# Altium PCB PCB_AltiumExport_OpenComs_ABP1_2023-05-12.pcbdoc
Units mil, origin at the board's own origin, x right, y up, seen from the top; angles counter-clockwise.
Board outline 4199.99 x 4586.61 mil, 2 copper layers (Top Layer, Bottom Layer); 111 components, 82 nets, 307 pads, 82 vias.
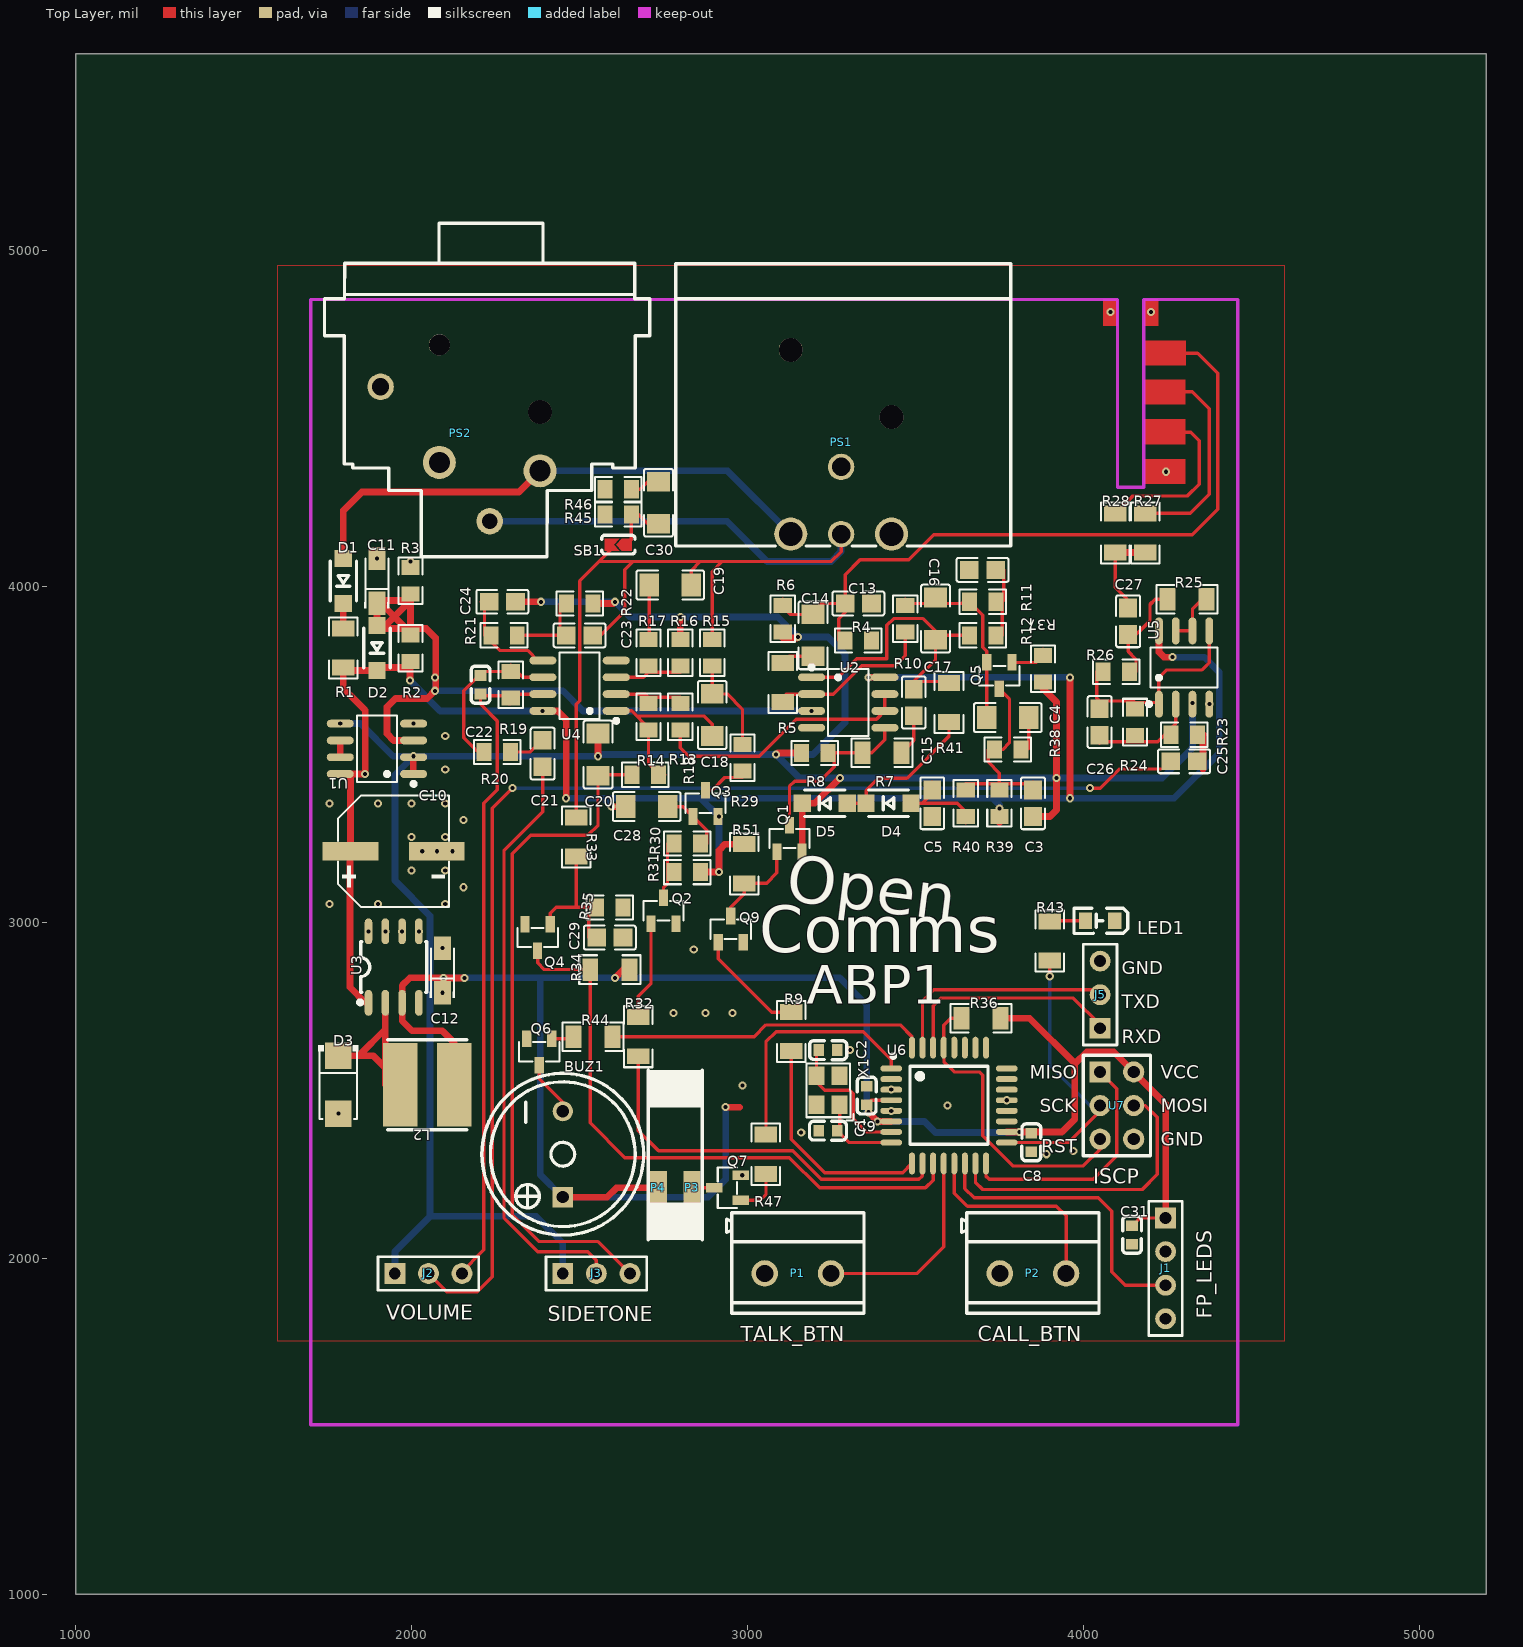
[diagram p0: Top Layer view]
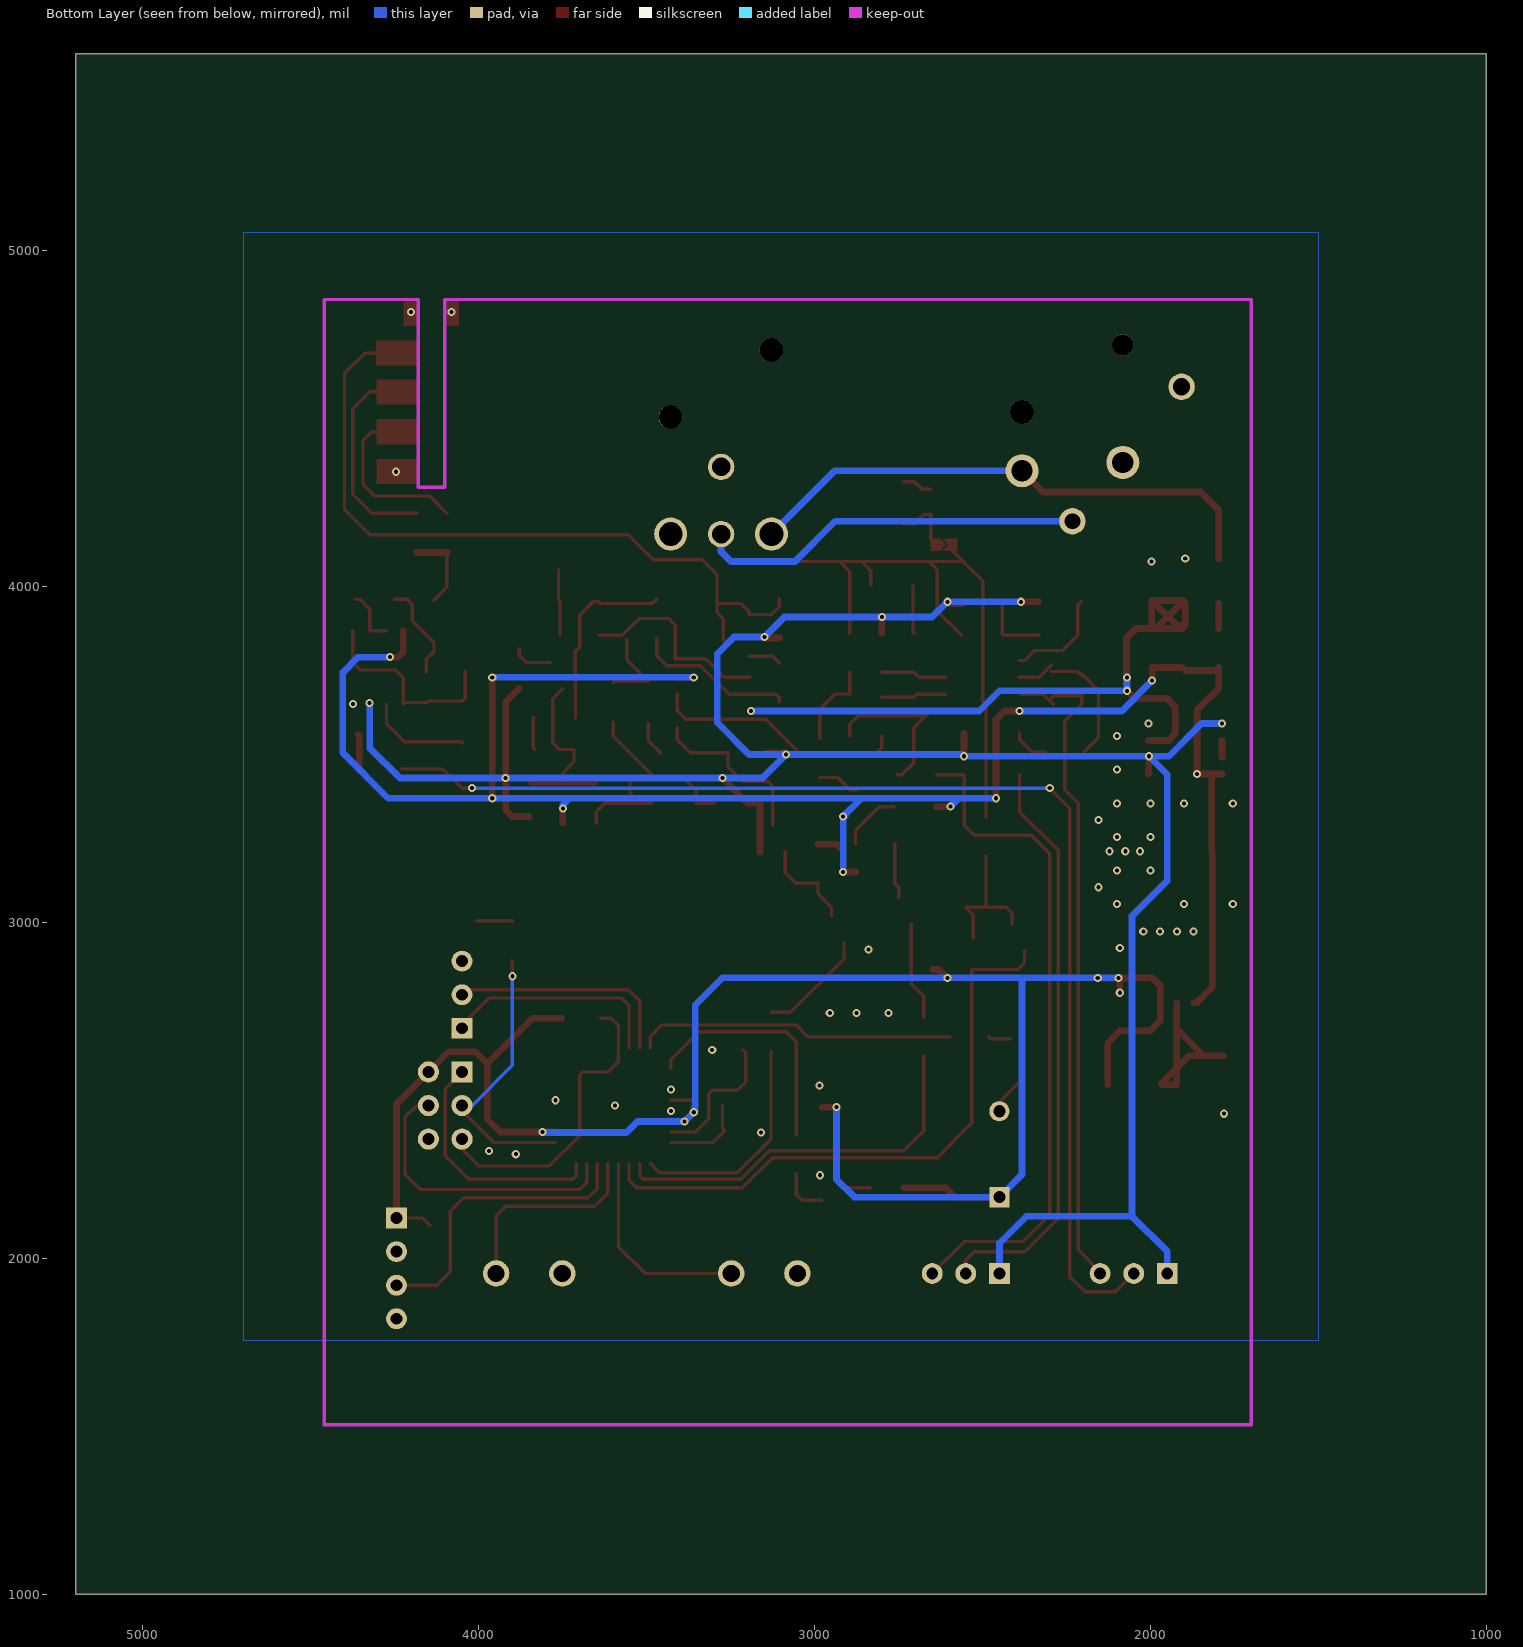
[diagram p1: Bottom Layer view, seen from below]

## Layer stack, top to bottom
Top Layer: signal copper (thickness not stored)
Dielectric: dielectric 12.6, FR-4, Dk 4.8
Bottom Layer: signal copper (thickness not stored)

## Board outline
5199.99,1000 1000,1000 1000,5586.61 5199.99,5586.61

## Components (designator, comment, footprint, x,y, rotation, side; value= is the part's Value field where it differs from the comment)
BUZ1 "CHENZJ1:BUZZER_12X9.5RM6.5" BUZ-TH_BD12.0-P6.50-D0.6_SEA-1285F 2450,2310.01 r90 top
C1 "22p" C0603 3240,2380.01 r0 top
C2 "22p" C0603 3240,2620 r180 top
C3 "100p" C0805 3850,3355 r90 top
C4 "820p" C1206 3775,3610 r0 top
C5 "0.47u" C0805 3550,3355 r90 top
C8 "1u" C0603 3845,2345.01 r270 top
C9 "1u" C0603 3355,2485.01 r90 top
C10 "100uF" CAP-SMD_BD8.0-L8.3-W8.3-FD 1946.5,3212.21 r0 top
C11 "10uF" CAP-SMD_L3.2-W1.6-RD-C7171 1896.5,4017.21 r90 top
C12 "10uF" CAP-SMD_L3.2-W1.6-RD-C7171 2091.5,2857.21 r90 top
C13 "470p" C0805 3330,3950 r180 top
C14 "1u" C1206 3195,3855 r270 top
C15 "0.022u" C0805 3495,3655 r270 top
C16 "0.0047u" C0805 3700,4050 r180 top
C17 "820p" C1206 3560,3905 r270 top
C18 "4.7u" C1206 2895.06,3617.91 r90 top
C19 "1u" C1206 2770,4005 r0 top
C20 "0.0022u" C1206 2555,3500 r90 top
C21 "0.047u" C0805 2390.1,3502.9 r90 top
C22 "56p" C0603 2205.1,3707.9 r270 top
C23 "0.047u" C0805 2500,3855 r180 top
C24 "150p" C0805 2270,3955 r180 top
C25 "0.47u" C0805 4300,3480 r0 top
C26 "39p" C0805 4048.5,3596.9 r90 top
C27 "47u" C0805 4133.5,3896.9 r90 top
C28 "1u" C1206 2700,3345 r180 top
C29 "0.022u" C0805 2590,2955 r180 top
C30 "10u" C1206 2735,4250 r270 top
C31 "1u" C0603 4145,2070.01 r270 top
D1 "1N4148W" SOD-123FL_L2.6-W1.6-LS3.4-RD 1796.5,4017.21 r270 top
D2 "1N4148W" SOD-123FL_L2.6-W1.6-LS3.4-RD 1896.5,3817.21 r270 top
D3 "SS210" SMA_L4.3-W2.6-LS5.2-RD 1781.5,2517.21 r270 top
D4 "1N4148W" SOD-123FL_L2.6-W1.6-LS3.4-RD 3420,3355 r180 top
D5 "1N4148W" SOD-123FL_L2.6-W1.6-LS3.4-RD 3230,3355 r180 top
J1 "FP_LEDS" HDR-M-2.54_1X4 4245,1970.01 r270 top
J2 "VOLUME" HDR-M-2.54_1X3 2050,1955.01 r0 top
J3 "SIDETONE" HDR-M-2.54_1X3 2550,1955.01 r0 top
J5 "SERIAL" HDR-M-2.54_1X3 4050,2785 r90 top
L2 "68uH" IND-SMD_L6.0-W6.0_SWRH5D 2046.5,2517.21 r180 top
LED1 "FC-2012HRK-620D" LED0805-RD_RED 4050,3005 r180 top
P1 "TALK_BTN" CONN-TH_2P-P5.00 3150,1955.01 r0 top
P2 "CALL_BTN" CONN-TH_2P-P5.00 3850,1955.01 r0 top
P3 "TESTPAD50" TESTPAD-50-ROUND 2835,2210.01 r0 top
P4 "TESTPAD50" TESTPAD-50-ROUND 2735,2210.01 r0 top
PS1 "NC3MAAH-0" CONN-TH_NC3MAAH-0 3278.78,4256.58 r0 top
PS2 "NC3FAAH2" CONN-TH_NC3FAAH2 2145,4395 r180 top
Q1 "2N7002" SOT-23-3_L2.9-W1.3-P1.90-LS2.4-BR 3125,3250 r270 top
Q2 "SS8050" SOT-23-3_L2.9-W1.3-P1.90-LS2.4-BR 2750,3035 r270 top
Q3 "MMBT5401" SOT-23-3_L2.9-W1.3-P1.90-LS2.4-BR 2875,3355 r270 top
Q4 "SS8050" SOT-23-3_L2.9-W1.3-P1.90-LS2.4-BR 2375,2955 r90 top
Q5 "MMBF4393LT1G" SOT-23-3_L2.9-W1.3-P1.90-LS2.4-BR 3750,3735 r90 top
Q6 "SS8050" SOT-23-3_L2.9-W1.3-P1.90-LS2.4-BR 2380,2615 r90 top
Q7 "SS8050" SOT-23-3_L2.9-W1.3-P1.90-LS2.4-BR 2940,2210.01 r0 top
Q9 "SS8050" SOT-23-3_L2.9-W1.3-P1.90-LS2.4-BR 2950,2980 r270 top
R1 "22" R1206 1796.5,3817.21 r270 top
R2 "220k" R0805 1996.5,3817.2 r270 top
R3 "220k" R0805 1996.5,4017.2 r270 top
R4 "47k" R0805 3330,3840 r180 top
R5 "1k" R1206 3105,3715 r270 top
R6 "15k" R0805 3105,3905 r270 top
R7 "100k" R1206 3400,3505 r180 top
R8 "220k" R0805 3200,3505 r0 top
R9 "10k" R1206 3130,2675 r90 top
R10 "2.7k" R0805 3470,3905 r90 top
R11 "15k" R0805 3700,3955 r180 top
R12 "6.8k" R0805 3700,3855 r0 top
R13 "20k" R0805 2800.1,3612.9 r90 top
R14 "20k" R0805 2705.1,3612.9 r270 top
R15 "430" R0805 2895.1,3802.9 r90 top
R16 "47k" R0805 2800.1,3802.9 r270 top
R17 "47k" R0805 2705.1,3802.9 r90 top
R18 "2.2k" R0805 2695,3440 r180 top
R19 "120k" R0805 2295.1,3707.9 r270 top
R20 "47k" R0805 2255.1,3507.9 r180 top
R21 "15k" R0805 2275,3855 r180 top
R22 "220k" R0805 2500,3950 r180 top
R23 "5.6k" R0805 4300,3559.1 r180 top
R24 "150k" R0805 4153.5,3596.9 r90 top
R25 "22" R1206 4308.49,3961.94 r180 top
R26 "39" R0805 4098.5,3746.9 r0 top
R27 "0" R1206 4185,4160 r90 top
R28 "0" R1206 4095,4160 r90 top
R29 "2.7k" R0805 2985,3490 r90 top
R30 "330k" R0805 2820,3235 r0 top
R31 "47k" R0805 2820,3150 r180 top
R32 "4.7k" R1206 2675,2660 r270 top
R33 "100k" R1206 2490,3255 r90 top
R34 "10k" R1206 2590,2860 r0 top
R35 "470k" R0805 2590,3045 r180 top
R36 "1k" R1206 3695,2715 r0 top
R37 "150" R0805 3880,3755 r270 top
R38 "330k" R0805 3775,3515 r0 top
R39 "10M" R0805 3750,3355 r90 top
R40 "470k" R0805 3650,3355 r90 top
R41 "10k" R1206 3600,3655 r90 top
R43 "10k" R1206 3900,2945 r270 top
R44 "4.7k" R1206 2540,2660 r0 top
R45 "2.2k" R0805 2615,4215 r0 top
R46 "200" R0805 2615,4290 r180 top
R47 "4.7k" R1206 3055,2310.01 r90 top
R51 "10k" R1206 2990,3175 r90 top
SB1 "Jumper" PAD-JUMPER-2-NC_BY_PASTE_YES_SILK 2613,4125 r180 top
U1 "NE5532DR" SOIC-8_L4.9-W3.9-P1.27-LS6.0-BL 1896.5,3517.21 r90 top
U2 "NE5532DR" SOIC-8_L4.9-W3.9-P1.27-LS6.0-BL 3300,3655 r270 top
U3 "XL1509-5.0E1" SOIC-8_L5.0-W4.0-P1.27-LS6.0-BL 1946.5,2867.21 r0 top
U4 "NE5532DR" SOIC-8_L4.9-W3.9-P1.27-LS6.0-BL 2500,3705 r90 top
U5 "NE5532DR" SOIC-8_L4.9-W3.9-P1.27-LS6.0-BL 4299.99,3759.15 r0 top
U6 "ATMEGA328P-AU" TQFP-32_L7.0-W7.0-P0.80-LS9.0-BL 3600,2455.01 r270 top
U7 "ISCP" "SPI HEADER" 4100,2455.01 r0 top
X1 "16MHz" OSC-SMD_4P-L3.2-W2.5-BL 3240,2500.01 r90 top

## Footprints (in the part's own frame and the unit in brackets; to place one, negate y for a bottom-side part, rotate by r counter-clockwise, add the part's x,y. Pads: shape width x height; smd on the part's side, far side on the other; paste and mask are expansions set on the pad)
BUZ-TH_BD12.0-P6.50-D0.6_SEA-1285F [mil]
  rect 60x60 hole 36: 1(-127.95,0)
  round 60 hole 36: 2(127.95,0)
  silkscreen extent -241,-241 241,241
C0603 [mm]
  rect 0.8x0.9 smd: 1(-0.7,0) 2(0.7,0)
  silkscreen extent -1.41,-0.71 1.39,0.72
C0805 [mm]
  rect 1.41x1.35 smd: 1(-1,0) 2(1,0)
  silkscreen extent -1.96,-0.9 1.96,0.9
C1206 [mm]
  rect 1.485x1.728 smd: 1(-1.593,0) 2(1.593,0)
  silkscreen extent -2.56,-1.09 2.56,1.09
CAP-SMD_BD8.0-L8.3-W8.3-FD [mm]
  rect 4.2x1.4 smd: 1(-3.267,0) 2(3.267,0)
  silkscreen extent -4.2,-4.23 4.2,4.23
CAP-SMD_L3.2-W1.6-RD-C7171 [mil]
  rect 69.19x51.02 smd: 1(-66.39,0) 2(66.39,0)
  silkscreen extent -81,-37 66,37
CONN-TH_2P-P5.00 [mm]
  round 2 hole 1.3: 1(-2.504,0) 2(2.504,0)
  silkscreen extent -5.4,-3 5,4.6
CONN-TH_NC3FAAH2 [mm]
  round 2.5 hole 1.6: 1(1.59,0.635) 2(-6.03,1.27)
  round 2 hole 1.2: 3(-2.22,5.085)
  round 2 hole 1.3: 4(6.03,-5.085)
  round 1.8 hole 1.8 unplated: ""(-6.03,-3.175)
  round 1.6 hole 1.6 unplated: ""(1.59,-8.255)
  silkscreen extent -14.32,-17.44 10.28,7.76
CONN-TH_NC3MAAH-0 [mm]
  round 2.5 hole 1.8: 1(3.81,-2.54) 2(-3.81,-2.54)
  round 2 hole 1.4: 3(0,-2.54) 4(0,2.54)
  round 1.8 hole 1.8 unplated: ""(-3.81,11.386) ""(3.81,6.306)
  silkscreen extent -12.5,-3.44 12.83,17.9
HDR-M-2.54_1X3 [mil]
  rect 62x62 hole 35: 1(-100,0)
  round 62 hole 35: 2(0,0) 3(100,0)
  silkscreen extent -150,-50 150,50
HDR-M-2.54_1X4 [mil]
  rect 62x62 hole 35: 1(-150,0)
  round 62 hole 35: 2(-50,0) 3(50,0) 4(150,0)
  silkscreen extent -200,-50 200,50
IND-SMD_L6.0-W6.0_SWRH5D [mm]
  rect 2.6x6.3 smd: 1(-2.05,0) 2(2.05,0)
  silkscreen extent -3,-3.4 3,3.4
LED0805-RD_RED [mm]
  rect 1x1.25 smd: 1(-1.1,0) 2(1.1,0)
  silkscreen extent -2.1,-0.95 1.98,0.96
OSC-SMD_4P-L3.2-W2.5-BL [mm]
  rect 1.4x1.2 smd: 1(-1.1,-0.875) 2(1.1,-0.875) 3(1.1,0.875) 4(-1.1,0.875)
  silkscreen extent -2.29,-1.9 2.03,1.65
PAD-JUMPER-2-NC_BY_PASTE_YES_SILK [mil]
  round 0 smd: 1(-27,0) 2(33,0)
  Top Layer region: -13,-18 -42,-18 -42,18 -13,18 3.5,0
  Top Layer region: -5.5,18 38,18 38,-18 -5.5,-18 11,0
  silkscreen extent -52,-28 47,28
R0805 [mil]
  rect 44.59x54.21 smd: 1(-39.37,0) 2(39.37,0)
  silkscreen extent -69,-36 69,36
R1206 [mil]
  rect 47.54x66.97 smd: 1(-58.22,0) 2(58.22,0)
  silkscreen extent -91,-42 91,42
SMA_L4.3-W2.6-LS5.2-RD [mm]
  rect 2x2 smd: 1(-2.2,0) 2(2.2,0)
  silkscreen extent -2.98,-1.5 2.6,1.5
SOD-123FL_L2.6-W1.6-LS3.4-RD [mm]
  rect 1.3x1.3 smd: 1(1.7,0) 2(-1.7,0)
  silkscreen extent -1.5,-1 1.5,1
SOIC-8_L4.9-W3.9-P1.27-LS6.0-BL [mm]
  oval 0.588x2.045 smd: 1(-1.905,-2.773) 2(-0.635,-2.773) 3(0.635,-2.773) 4(1.905,-2.773) 5(1.905,2.773) 6(0.635,2.773) 7(-0.635,2.773) 8(-1.905,2.773)
  silkscreen extent -2.8,-2.92 2.53,1.52
SOIC-8_L5.0-W4.0-P1.27-LS6.0-BL [mil]
  oval 22.38x76.78 smd: 1(-75,-106.5) 2(-25,-106.5) 3(25,-106.5) 4(75,-106.5) 5(75,106.5) 6(25,106.5) 7(-25,106.5) 8(-75,106.5)
  silkscreen extent -106,-111 98,75
SOT-23-3_L2.9-W1.3-P1.90-LS2.4-BR [mm]
  rect 1.25x0.7 smd: 1(1,-0.95) 2(1,0.95) 3(-1,0)
  silkscreen extent -0.73,-1.53 0.73,1.53
"SPI HEADER" [mm]
  rect 1.6x1.6 hole 0.914: 1(-1.27,2.54)
  round 1.6 hole 0.914: 2(1.27,2.54) 3(-1.27,0) 4(1.27,0) 5(-1.27,-2.54) 6(1.27,-2.54)
  silkscreen extent -2.54,-3.81 2.54,3.81
TESTPAD-50-ROUND [mil]
  rect 50x100 smd: 1(0,0)
TQFP-32_L7.0-W7.0-P0.80-LS9.0-BL [mm]
  oval 0.45x1.65 smd: 1(-2.8,-4.369) 2(-2,-4.369) 3(-1.2,-4.369) 4(-0.4,-4.369) 5(0.4,-4.369) 6(1.2,-4.369) 7(2,-4.369) 8(2.8,-4.369) 17(2.8,4.369) 18(2,4.369) 19(1.2,4.369) 20(0.4,4.369) 21(-0.4,4.369) 22(-1.2,4.369) 23(-2,4.369) 24(-2.8,4.369)
  oval 1.65x0.45 smd: 9(4.382,-2.8) 10(4.382,-2) 11(4.381,-1.2) 12(4.381,-0.4) 13(4.381,0.4) 14(4.381,1.2) 15(4.381,2) 16(4.381,2.8) 25(-4.382,2.8) 26(-4.382,2) 27(-4.381,1.2) 28(-4.381,0.4) 29(-4.381,-0.4) 30(-4.381,-1.2) 31(-4.381,-2) 32(-4.381,-2.8)
  silkscreen extent -3.91,-4.36 2.94,2.95

## Via types
v1: diameter 24, hole 12, Top Layer to Bottom Layer, tented both sides, 82 vias

## Nets (pads, with @x,y where several pads share a name; then routed paths per layer and width w, separated by ;. In a path a pad name is that pad's centre, name@x,y a point inside that pad or via, vN(x,y) a via of type N, cw(c..) or ccw(c..) an arc to the next point about the centre after c; other vN are vias at no path point)
15VREF: C11.1 D2.2 R2.1 R3.2 U1.3 U2.3 | length 2379.1
  Top Layer w20.16: D2.2 1921.6,3884.1 R3.2@1996.5,3959 ; U1.3@2005.6,3542.2 1946.5,3542.2 1926.5,3562.2 1926.5,3642.2 1951.5,3667.2 2046.5,3667.2 2071.5,3692.2 2071.5,3847.2 2043.3,3875.4 1996.5,3875.4 1983.3,3875.4 1907.9,3950.8 C11.1 ; C11.1 D2.2 1905.21,3875.43 1996.5,3875.43 R3.2@1996.5,3958.99 ; C11.1 1904.67,3958.99 R3.2@1996.5,3958.99
  Bottom Layer w20.16: v1(2070,3730) v1(2070,3690) 2450,3690 2510,3630 v1(3190,3630)
+5V: BUZ1.1 C8.1 C9.1 C12.1 C31.1 J1.1 L2.1 P4.1 R34.2 R36.2 U3.3 U6.4 U6.6 U6.18 U7.2 | length 6243.1
  Top Layer w10: C9.1 3368.31,2470.76 U6.4 ; C31.1 4167.4,2120 J1.1
  Top Layer w19.68: 2076.5,2832.21 2079.29,2835 v1(2095,2835) ; v1(2091.5,2790.82) 2091.5,2835 1994.3,2835 1971.5,2812.2 U3.3 1971.5,2707.2 2001.5,2677.2 2091.5,2677.2 2127.2,2641.5 L2.1 ; R36.2 3840,2715 3975,2580 ; U6.18 v1(3810.48,2376.27) ; v1(3810.48,2376.27) 3936.3,2376.3 3975,2415 3975,2580 ; J1.1 4245,2460 4090,2615 4010,2615 3975,2580
  Top Layer w20.16: v1(2091.5,2790.82) 2091.5,2835 v1(2157.09,2835) ; BUZ1.1 2582,2182 2610,2210 P4.1 ; v1(2605,2835) 2630,2860 R34.2 ; v1(2935,2450) 2976.78,2450.01 ; C9.1 3360,2452.45 v1(3360,2435) v1(3387.23,2407.77) U6.6
  Bottom Layer w19.68: v1(2095,2835) v1(2157.09,2835) v1(2605,2835) 3275,2835 3355,2755 3355,2440 v1(3387.23,2407.77) ; 2382.62,2835 2382.62,2249.43 BUZ1.1
  Bottom Layer w20.16: BUZ1.1 2882,2182.1 2935,2235 v1(2935,2450) ; v1(3387.23,2407.77) 3527.2,2407.8 3560,2375 3809.2,2375 v1(3810.48,2376.27)
+15V: C3.1 C20.2 C24.1 D5.1 J2.1 J3.1 Q1.2 R6.2 R8.1 R16.1 R22.1 R37.2 U1.1 U1.2 U1.5 U5.3 | length 7487.3
  Top Layer w19.68: v1(2005,3495) 2005,3443.71 U1.1@2006.5,3442.21
  Top Layer w20.16: C24.1@2332.7,3955 v1(2385,3955) ; v1(2555,3495) C20.2 ; R22.1@2558.22,3950.01 2600.01,3950.01 v1(2605,3955) ; v1(2800,3910) 2800,3861.18 R16.1@2800.06,3861.12 ; v1(3085,3500) 3090,3505 R8.1@3141.78,3505 ; R6.2@3105,3846.78 3146.79,3846.78 v1(3150,3850) ; Q1.2 3163.1,3211.33 3163.1,3253.11 D5.1 ; D5.1 3200,3355 v1(3275,3430) ; C3.1 3900.6,3315.6 3920,3335 v1(3920,3430) 3920,3656.78 R37.2@3880,3696.78
  Bottom Layer w20.16: v1@1787.3,3592.2 1847.8,3592.2 1945,3495 v1(2005,3495) ; J2.1 1950,2020 2055,2125 ; v1(2385,3955) v1(2605,3955) 2650,3910 3090,3910 v1(3150,3850) 3195,3850 3240,3850 3290,3800 3290,3690 3290,3595 3195,3500 v1(3085,3500) ; J3.1 2450,2045 2370,2125 2055,2125 ; v1(4324.99,3654.15) 4325,3520 4235,3430 v1(3920,3430) v1(3275,3430) 3155,3430 v1(3085,3500) ; v1(2005,3495) 1950,3440 1950,3125 2055,3020 2055,2125 ; v1(2005,3495) 2520,3495 v1(2555,3495) 2560,3500 v1(3085,3500)
  other v1: 1787.35,3592.21
+30V: C10.1 C28.2 D2.1 Q3.2 R1.2 R2.2 R31.1 R39.1 R51.2 U1.8 U2.8 U3.1 U4.8 U5.8 | length 6274.5
  Top Layer w19.68: C10.1 1816.5,3210.84 1816.5,2807.21 1863,2760.71 U3.1
  Top Layer w20.16: U1.8 v1(1861.5,3442.21) ; C10.1 1817.9,3442.2 v1(1861.5,3442.21) ; v1(1995,3720) 1995,3757.49 1996.5,3758.99 1905.21,3758.99 D2.1 1805.21,3750.28 R1.2 1796.5,3697.2 1861.5,3632.2 v1(1861.5,3442.21) ; U4.8 2435,3630 2460,3605 v1(2460,3370) ; v1(2595,3345) C28.2 ; R31.1@2878.2,3150 v1(2915,3150) 2915,3215 2933.2,3233.2 R51.2 ; v1(3360,3730) U2.8 ; R39.1@3750,3296.78 v1(3750,3340) ; v1(3960,3370) v1(3960,3730) ; U5.8 4225,3805 4240,3790 v1(4265,3790)
  Bottom Layer w20.16: v1(1995,3720) 2085,3630 v1(2390,3630) ; v1(2460,3370) 2570,3370 ; v1(2595,3345) 2570,3370 ; v1@2910,3315 v1(2915,3315) ; v1(2915,3150) v1(2915,3315) ; v1(3360,3730) 3940,3730 v1(3960,3730) ; v1(3750,3340) 3750,3350 3730,3370 ; v1(4265,3790) 4360,3790 4405,3745 4405,3690 4405,3505 4270,3370 3980,3370 3730,3370 ; 2570,3370 2860,3370 ; 2860,3370 3655,3370 3730,3370 ; 2860,3370 v1(2915,3315)
BUS: C19.2 C23.1 PS1.3 PS2.3 R15.2 R33.2 SB1.2 | length 3463.6
  Top Layer w10: R33.2 2490,3650.01 2500,3660.01 2500,4017 2550,4067 2558,4075 ; C23.1@2562.7,3855 2635,3927.3 2635,4050 2660,4075 ; 2590,4125 2590,4107 2558,4075 ; C19.2 2832.69,4047.69 2860,4075 2891.65,4075 ; R15.2@2895.1,3861.1 2895.1,4045.1 2925,4075 3250,4075 3278.8,4103.8 PS1.3 ; 2990,4075 2660,4075 ; 2558,4075 2660,4075
  Bottom Layer w20.16: PS2.3 2938.9,4194.8 3058.7,4075 3249.3,4075 3278.8,4104.5 PS1.3
BUS_TERM: C30.2 R45.2 SB1.1 | length 188
  Top Layer w10: SB1.1 2654.37,4139.37 R45.2 ; R45.2 2675,4215 2702.7,4187.3 C30.2
BUZ1_2: BUZ1.2 Q6.3 | length 166.6
  Top Layer w10: Q6.3 2380,2535 2450,2465 BUZ1.2
BUZZER: R44.2 U6.32 | length 953.2
  Top Layer w10: R44.2 3020,2660 3055,2695 3455,2695 3489.8,2660.2 U6.32
C4_2: C4.2 R38.2 | length 96.9
  Top Layer w10: R38.2@3833.22,3515 3837.7,3519.48 C4.2
C14_2: C14.2 R5.1 | length 97.9
  Top Layer w10: R5.1 3124.09,3792.3 C14.2
C15_2: C15.2 R7.1 | length 102.5
  Top Layer w10: R7.1 3495,3541.79 C15.2@3495,3592.31
C21_1: C21.1 J3.2 | length 1734.7
  Top Layer w10: C21.1@2390.1,3440.2 2390.1,3330.1 2275,3215 2275,2120 2375,2020 2525,2020 2550,1995 J3.2
C21_2: C21.2 R20.1 | length 112.7
  Top Layer w10: R20.1@2313.3,3507.9 2352.9,3507.9 2390.1,3545.1 C21.2@2390.1,3565.6
C23_2: C23.2 R21.1 R22.2 | length 200.9
  Top Layer w10: R21.1@2333.22,3855 2437.3,3855 2441.78,3859.47 R22.2@2441.78,3950.01
C25_1: C25.1 J2.2 | length 3665.7
  Top Layer w10: J2.2 2105,1900 2195,1900 2240,1945 2240,3340 v1(2300,3400) ; v1(4020,3400) 4049.99,3400 4106.94,3456.95 4230.8,3456.95
  Bottom Layer w10: v1(2300,3400) v1(4020,3400)
C25_2: C25.2 R23.1 | length 103
  Top Layer w20.16: C25.2@4356.19,3456.95 4356.19,3557.12 R23.1@4358.21,3559.15
C27_2: C27.2 R27.1 R28.1 | length 248.1
  Top Layer w10: R28.1 4095,3998.14 C27.2@4133.5,3959.64
  Top Layer w20.16: R28.1 R27.1
CALL_BUTTON: P2.2 U6.13 | length 620.6
  Top Layer w10: U6.13 3615.7,2194.3 3655,2155 3920,2155 3948.6,2126.4 P2.2
CALL_OUT: C18.2 R15.1 R29.2 | length 259.7
  Top Layer w10: R15.1@2895.06,3744.69 C18.2 2939.4,3680.6 2985,3635 R29.2@2985,3548.22
CALL_SEND: R32.2 U6.10 | length 1169
  Top Layer w10: R32.2 2675,2380 2735,2320 3135,2320 3220,2235 3510,2235 3520,2245 3520,2281.2 U6.10
D4_1: D4.1 D5.2 R41.1 | length 450
  Top Layer w10: D5.2 D4.1 ; D4.1 3353.1,3393.1 3390,3430 3475,3430 3600,3555 R41.1
FP_LED_DATA_IN: J1.3 U6.14 | length 897.2
  Top Layer w10: U6.14 3647.2,2207.8 3675,2180 4045,2180 4085,2140 4085,1960 4125,1920 J1.3
FP_LED_DATA_OUT: J1.4
GND: C1.1 C2.1 C5.1 C8.2 C9.2 C10.2 C11.2 C12.2 C13.1 C16.2 C29.1 C31.2 D3.2 J1.2 J5.3 LED1.1 P1.1 P2.1 PS1.1 PS1.4 PS2.1 PS2.4 Q2.2 Q4.2 Q6.2 Q7.2 Q9.2 R3.1 R4.1 R35.1 R45.1 R46.2 U1.4 U2.4 U3.5 U3.6 U3.7 U3.8 U4.4 U5.4 U6.3 U6.5 U6.21 U7.6
  other v1: 2984.37,2247.4 3890,2310 3970,2320 3160,2375 1781.5,2430.6 3428,2439.26 3595,2455 3772,2470.76 3428,2502.25 2985,2515 3305,2620 2780,2730 2875,2730 2955,2730 2840,2920 2091.5,2923.6 1871.5,2973.71 1921.5,2973.71 1971.5,2973.71 2021.5,2973.71 1755,3055 1900,3055 2100,3055 2155,3105 2000,3155 2100,3155 2031.5,3212.21 2075.13,3212.21 2121.5,3212.21 2000,3255 2100,3255 2155,3305 1755,3355 1900,3355 2000,3355 2100,3355 2100,3455 2100,3555 2005.65,3592.21 4375,3650 1996.5,4075.43 1896.5,4083.6 4246.5,4342.21 4081.5,4817.2 4201.5,4817.2
HP_L: R28.2 | length 481.3
  Top Layer w10: R28.2 4146.79,4270 4310,4270 4345,4305 4345,4435 4320,4460 4290,4460
HP_R: R27.2 | length 629.2
  Top Layer w10: R27.2 4318.2,4218.2 4375,4275 4375,4530 4325,4580 4235,4580
MCU_MISO: U6.16 U7.1 | length 731.3
  Top Layer w10: U6.16 3710.2,2244.8 3720,2235 4030,2235 4100,2305 4100,2505 U7.1
MCU_MOSI: U6.15 U7.4 | length 879.5
  Top Layer w10: U6.15 3678.7,2226.3 3700,2205 4175,2205 4220,2250 4220,2420 4185,2455 U7.4
MCU_RESET: R36.1 U6.29 U7.5 | length 920
  Top Layer w10: R36.1 3605,2715 3584.2,2694.3 U6.29 3585,2585 3615,2555 3690,2555 3700,2545 3700,2365 3790,2275 4000,2275 4050,2325 U7.5
MCU_RXD: J5.1 U6.30 | length 674.8
  Top Layer w10: U6.30 3552.8,2752.8 3575,2775 3970,2775 4050,2695 J5.1
MCU_SCK: R43.2 U6.17 U7.3 | length 843.9
  Top Layer w10: U6.17 3954.8,2344.8 4050,2440 U7.3 ; v1(3900,2840) R43.2
  Bottom Layer w10: v1(3900,2840) 3900,2575 4020,2455 U7.3
MCU_TXD: J5.2 U6.31 | length 687.7
  Top Layer w10: U6.31 3521.3,2766.3 3555,2800 4035,2800 J5.2
MIC: C13.2 C14.1 R4.2 R6.1 | length 2219.1
  Top Layer w10: R6.1@3105,3963.2 3105,3940 3127.8,3917.2 C14.1@3195,3917.2 ; C14.1 3195,3925 3220,3950 C13.2 3290.63,3923.34 3271.78,3904.49 R4.2@3271.78,3840 ; C13.2 3290.6,4035.6 3335,4080 3480,4080 3555,4155 4325,4155 4400,4230 4400,4635 4340,4695 4240,4695
MIC_MUTE: R9.1 U6.9 | length 674.4
  Top Layer w10: R9.1 3130,2355 3230,2255 3462.3,2255 U6.9
MIC_OUT: R13.1 U2.6 U2.7 | length 760.1
  Top Layer w10: R13.1@2800.1,3554.7 2800.1,3519.9 2825,3495 3035,3495 3145,3605 3384.1,3605 U2.6 ; U2.6 U2.7
MOTOR: R47.2 U6.1 | length 723.3
  Top Layer w10: R47.2 3055,2645.01 3085,2675.01 3345,2675.01 3428,2592 U6.1
P3_1: P3.1 Q7.3 | length 65.6
  Top Layer w10: P3.1 Q7.3
Q1_1: Q1.1 Q9.3 R51.1 | length 287.3
  Top Layer w10: Q9.3 2950,3045 2990,3085 R51.1 3056.8,3116.8 3087.6,3147.6 Q1.1
Q2_1: Q2.1 R32.1 | length 293
  Top Layer w10: R32.1 2675,2780.01 2712.6,2817.61 Q2.1
Q2_3: Q2.3 R30.1 R31.2 | length 165.5
  Top Layer w10: Q2.3 2750,3105 2761.8,3116.8 2761.8,3150 R30.1@2761.78,3235
Q3_1: C28.1 Q3.1 R30.2 | length 184.5
  Top Layer w10: C28.1 2808.23,3345 Q3.1 2878.22,3275.01 R30.2@2878.22,3235
Q3_3: Q3.3 R29.1 | length 125.5
  Top Layer w10: Q3.3 2894.38,3394.38 2931.78,3431.78 R29.1@2985,3431.78
Q5_1: Q5.1 R37.1 | length 119.3
  Top Layer w10: Q5.1 3859.4,3774.4 3880,3795 R37.1@3880,3813.2
Q5_3: C3.2 Q5.3 R38.1 R39.2 R40.2 | length 562
  Top Layer w10: R40.2@3650,3413.22 R39.2@3750,3413.22 ; Q5.3 3780,3665.63 3780,3535 3760,3515 3716.78,3515 3716.78,3478.22 3750,3445 R39.2@3750,3413.22 ; C3.2@3850,3417.7 3845.52,3413.22 R39.2@3750,3413.22
Q6_1: Q6.1 R44.1 | length 66.7
  Top Layer w10: Q6.1 2476.16,2654.37 R44.1
R1_1: D1.1 R1.1 | length 74.9
  Top Layer w20.16: R1.1 D1.1
R9_2: Q9.1 R9.2 | length 331.4
  Top Layer w10: Q9.1 2912.6,2892.6 3072,2733.2 R9.2
R10_2: C4.1 C17.1 Q5.2 R10.2 R11.2 | length 567.2
  Top Layer w10: R10.2@3470,3963.22 3483.22,3950 3641.78,3950 3641.78,3955 3660,3955 3700,3915 3700,3820 3712.6,3807.4 Q5.2 C4.1
R11_1: C16.1 R11.1 R12.2 | length 196.8
  Top Layer w10: R12.2@3758.22,3855.01 3758.22,3955 3762.7,3959.48 C16.1@3762.7,4050
R17_2: C19.1 R17.2 | length 144.8
  Top Layer w10: R17.2@2705.06,3861.13 2707.3,3863.37 C19.1
R18_2: C20.1 J3.3 R18.2 | length 2017.9
  Top Layer w10: R18.2@2636.77,3440 2557.68,3440 C20.1 2555,3290 2525,3260 2355,3260 2300,3205 2300,2130 2380,2050 2555,2050 J3.3
R23_2: C26.1 R23.2 R24.1 U5.2 | length 308.2
  Top Layer w10: C26.1@4048.5,3534.25 4052.97,3538.73 4153.5,3538.73 4221.35,3538.73 4241.78,3559.15 4275,3592.37 U5.2
R25_2: C27.1 R25.2 R26.2 | length 294.6
  Top Layer w10: C27.1@4133.5,3834.25 4133.5,3806.94 4156.72,3783.72 R26.2@4156.72,3746.94 ; C27.1@4133.5,3834.3 4198.5,3899.2 4198.5,3946.9 4213.5,3962 R25.2@4250.3,3962
R33_1: C29.2 Q4.1 R33.1 R35.2 | length 490.6
  Top Layer w10: Q4.1 2412.4,3027.4 2430,3045 R35.2 ; R33.1 2490,3055.01 2490,3045 R35.2 2527.3,3021.67 C29.2@2527.3,2955
R40_1: C5.2 D4.2 R40.1 | length 281.8
  Top Layer w10: D4.2 3519.99,3355 ; C5.2@3550,3417.7 3550,3385.01 3519.99,3355 ; R40.1@3650,3296.78 3650,3330 3625,3355 3520,3355
R43_1: LED1.2 R43.1 | length 107.4
  Top Layer w10: R43.1 3901.78,3005 LED1.2
R46_1: C30.1 R46.1 | length 90
  Top Layer w10: R46.1 2680,4290 2702.7,4312.7 C30.1
R47_1: Q7.1 R47.1 | length 144.6
  Top Layer w10: Q7.1 3037.6,2172.6 3055,2190 R47.1
S$1126: 
S$35479: 
S$47642: 
S$47678: 
S$122728: 
S$122732: 
SIDETONE_OUT: C22.2 J2.3 R19.2 U4.7 | length 1998.1
  Top Layer w10: J2.3@2144.9,1954.8 2215,2024.9 2215,3354.9 2255,3394.9 2255,3600 2205.1,3649.9 C22.2 2205.1,3675 2288.6,3675 R19.2 ; R19.2@2289.96,3649.5 2320.26,3679.8 U4.7@2385.74,3679.8
SIGNAL_OUT: Q4.3 R34.1 U6.11 | length 1817.7
  Top Layer w10: Q4.3 2375,2880 2395,2860 R34.1 2531.8,2403.2 2635,2300 3125,2300 3215,2210 3530,2210 3552.8,2232.8 U6.11
TALK_BUTTON: P1.2 U6.12 | length 616.7
  Top Layer w10: P1.2 3505,1955 3584.2,2034.2 U6.12
U1_6: U1.6 U1.7 | length 50
  Top Layer w20.16: U1.7@1787.35,3492.21 U1.6@1787.35,3542.21
U2_1: C15.1 C17.2 R12.1 R41.2 U2.1 | length 861.1
  Top Layer w10: U2.1@3190.9,3730 3270,3730 3325,3785 3415,3785 3415,3885 3435,3905 3522.7,3905 3572.7,3855 R12.1@3641.8,3855 ; C17.2 3560,3782.7 3495,3717.7 3595.52,3717.7 R41.2
U2_2: R5.2 R10.1 U2.2 | length 481.8
  Top Layer w10: R5.2 3105,3670 3115,3680.01 U2.2@3190.85,3680.01 ; U2.2@3190.9,3680 3255,3680 3340,3765 3440,3765 3470,3795 R10.1@3470,3846.8
U2_5: Q1.3 R7.2 R8.2 U2.5 | length 517.9
  Top Layer w10: Q1.3 3125,3405 3140.2,3420.2 3215,3420.2 3258.2,3463.2 R8.2@3258.2,3505.2 ; R8.2@3258.22,3505 R7.2 3370,3505.01 3409.15,3544.15 U2.5
U3_2: D3.1 L2.2 U3.2 | length 762.3
  Top Layer w19.68: D3.1 1884.89,2603.82 1965.79,2522.92 L2.2 1921.5,2517.21 U3.2 1921.5,2682.2 1843.1,2603.8 D3.1
U4_1: C18.1 R14.2 R18.1 U4.1 | length 621.6
  Top Layer w10: R14.2@2705.06,3554.7 2705.06,3474.95 2740,3440 R18.1@2753.21,3440 ; R14.2@2705.1,3554.7 2705.1,3579.9 2655,3630 ; C18.1 2895.1,3589.9 2870,3615 2670,3615 2655,3630 ; 2655,3630 2609.1,3630 2655,3630
U4_2: R13.2 R14.1 U4.2 | length 194.6
  Top Layer w10: U4.2@2609.15,3680 2696.18,3680 2705.06,3671.12 R13.2@2800.06,3671.13
U4_3: R16.2 R17.1 U4.3 | length 197
  Top Layer w10: U4.3@2609.15,3730 2690.37,3730 2705.06,3744.68 R16.2@2800.06,3744.68
U4_5: C24.2 R21.2 U4.5 | length 309
  Top Layer w10: C24.2@2207.31,3955.01 2216.78,3945.54 2216.78,3855 2261.8,3810 2345,3810 2375,3780 U4.5
U4_6: C22.1 R19.1 R20.2 U4.6 | length 475.9
  Top Layer w10: R20.2@2196.8,3507.9 2155,3549.8 2155,3690 C22.1@2205.1,3740.1 ; C22.1 2216.91,3747.27 R19.1 ; R19.1@2295.06,3766.12 2331.18,3730 U4.6
U5_1: C26.2 R24.2 R26.1 U5.1 U5.5 | length 613.1
  Top Layer w10: R26.1@4040.28,3746.94 4040.28,3667.86 4048.5,3659.64 4149.02,3659.64 4153.5,3655.17 4219.83,3655.17 U5.1 4225,3728.45 4248.49,3751.95 4353.49,3751.95 4375,3773.45 U5.5
U5_6: R25.1 U5.6 U5.7 | length 168.7
  Top Layer w10: U5.7 U5.6 4325,3933.45 4353.5,3961.95 R25.1@4366.71,3961.95
U6_7: C2.2 U6.7 X1.3 | length 426.2
  Top Layer w10: X1.3 3205.5,2524.5 3230,2500 3305,2500 3315,2490 3315,2415 3353.7,2376.3 U6.7 ; X1.3 3205.54,2613.1 C2.2
U6_8: C1.2 U6.8 X1.1 | length 254.6
  Top Layer w10: X1.1 3274.44,2386.88 C1.2 3302.79,2344.77 U6.8
VCC: D1.2 PS1.2 PS2.2 | length 1602.2
  Top Layer w20.16: D1.2 1796.5,4227.2 1851.5,4282.2 2319.6,4282.2 PS2.2
  Bottom Layer w20.16: PS2.2 2940.36,4345 PS1.2
pads on no net: PS1. PS2. U3.4 U6.2 U6.19 U6.20 U6.22 U6.23 U6.24 U6.25 U6.26 U6.27 U6.28 X1.2 X1.4

## Polygon pours and split planes (outlines as drawn)
GND on Bottom Layer (solid): 1500,5055 1500,1755.01 4699.99,1755.01 4699.99,5055 1600,5055
GND on Top Layer (solid): 1600,1755.01 4599.99,1755.01 4599.99,4955 1600,4955

## Other copper
Top Layer:
  rectangle net MIC: 4184.29,4658.15 4306.34,4732.95
  rectangle net HP_R: 4182.32,4542.01 4304.37,4616.81
  rectangle net HP_L: 4182.32,4423.9 4304.37,4498.7
  rectangle net GND: 4182.32,4305.79 4304.37,4380.59
  rectangle net GND: 4180.4,4776.26 4223.66,4855
  rectangle net GND: 4058.31,4776.26 4101.57,4855

## Silkscreen, mask and mechanical layers (free items; w line width, h text height)
Top Overlay:
  region: 2705,2560 2865,2560 2865,2450 2705,2450
  region: 2705,2165.01 2865,2165.01 2865,2055.01 2705,2055.01
  lines w10 net S$122728: 2705,2055.01 2705,2560.01
  lines w10 net S$122732: 2865,2055.01 2865,2560.01
  text "Open" at 3105,3020 h236.22 r353
  text "Comms" at 3035,2865 h236.22
  text "GND" at 4115,2845.32 h39.37
  text "TXD" at 4115,2745 h40
  text "ABP1" at 3176.72,2719.02 h196.85
  text "RXD" at 4115,2640 h40
Top Solder:
  rectangle net GND: 4180.32,4303.79 4306.37,4382.59
  rectangle net HP_L: 4180.32,4421.9 4306.37,4500.7
  rectangle net HP_R: 4180.32,4540.01 4306.37,4618.81
  rectangle net MIC: 4182.29,4656.15 4308.34,4734.95
  rectangle net GND: 4178.4,4774.26 4225.66,4857
  rectangle net GND: 4056.31,4774.26 4103.57,4857
  region: 1700,1505.01 1700,1755.01 4460,1755.01 4460,1505.01
Bottom Solder:
  region: 1700,1505.01 1700,1755.01 4460,1755.01 4460,1505.01
Document:
  region net S$35479: 1719.02,5002.49 1719.02,4864.7 2722.96,4864.7 2722.96,5002.49
  region net S$35479: 2782.01,5002.49 2782.01,4864.7 3785.95,4864.7 3785.95,5002.49
  region: 4109.49,4855 4172.48,4855 4172.83,4303.82 4109.84,4303.82

## Text inside footprints (layer, text, board x,y; h text height)
U7: Top Overlay "VCC" at 4230,2535 h40; Top Overlay "MOSI" at 4230,2435 h40; Top Overlay "GND" at 4230,2335 h40; Top Overlay "RST" at 3875,2315 h40; Top Overlay "SCK" at 3870,2435 h40; Top Overlay "MISO" at 3840,2535 h40